# Altium PCB WirelessMonitorPCB.PcbDoc
Units mm, origin at the board's own origin, x right, y up, seen from the top; angles counter-clockwise.
Board outline 59 x 83.5 mm, 2 copper layers (Top Layer, Bottom Layer); 33 components, 22 nets, 109 pads, 10 vias.
Unrouted connection lines stored in the file: 23.
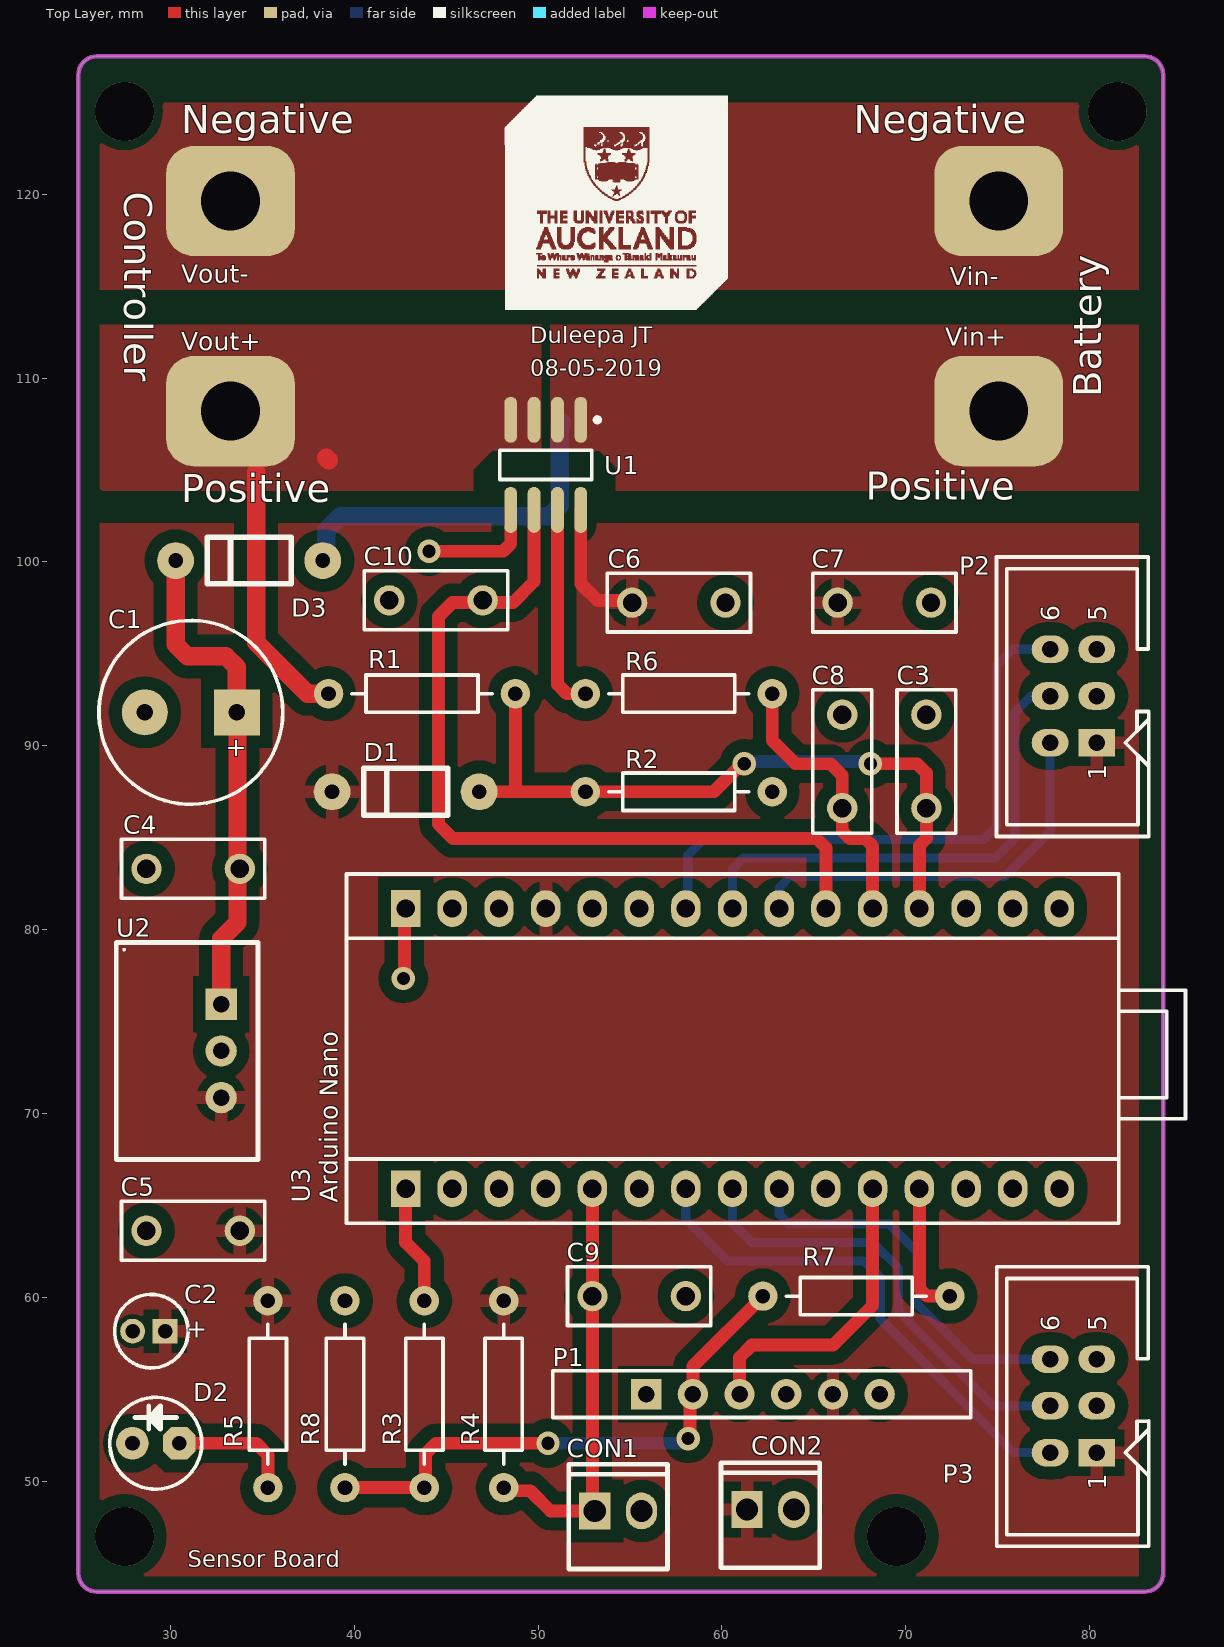
[diagram p0: Top Layer view]
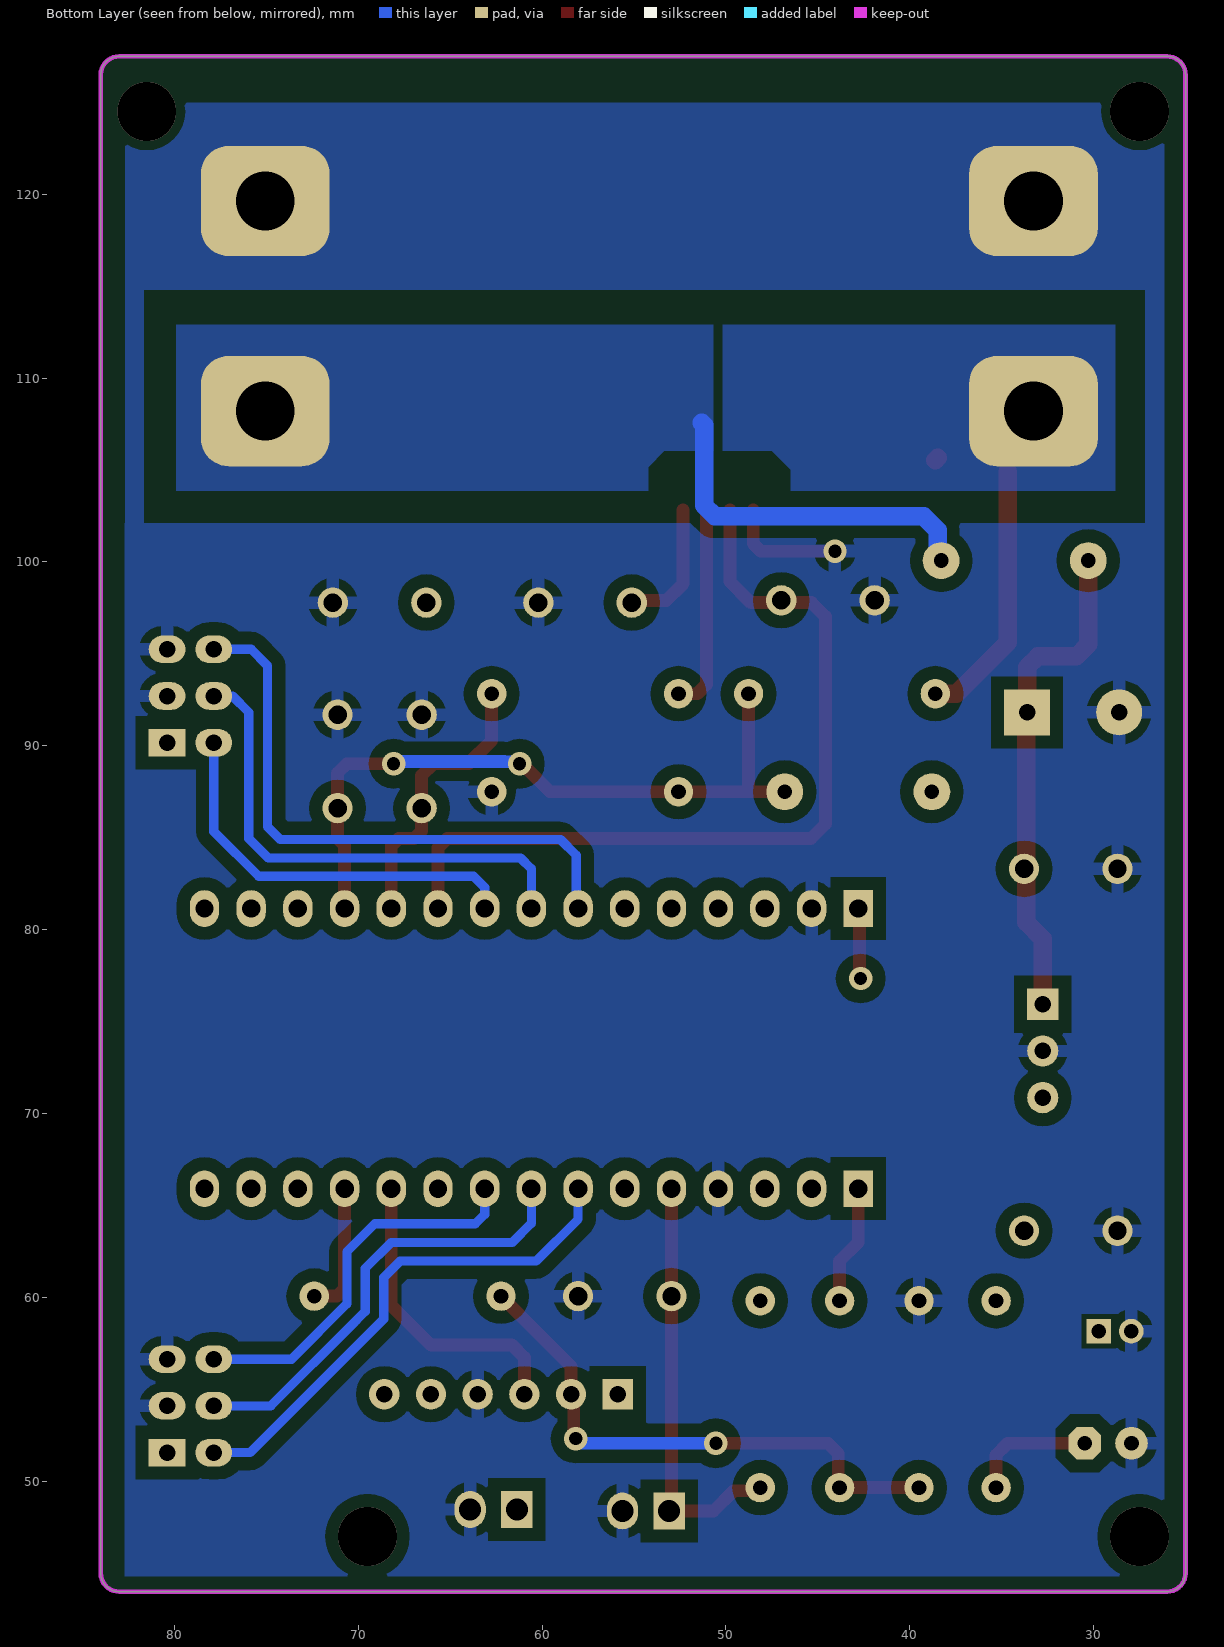
[diagram p1: Bottom Layer view, seen from below]

## Layer stack, top to bottom
Top Solder: solder mask 0.0102, Solder Resist, Dk 3.5
Top Layer: signal copper 0.0356
Dielectric 1: dielectric 0.32, FR-4, Dk 4.8
Bottom Layer: signal copper 0.0356
Bottom Solder: solder mask 0.0102, Solder Resist, Dk 3.5

## Board outline
26,44 cw(c26,45) 25,45 25,126.5 cw(c26,126.5) 26,127.5 83,127.5 cw(c83,126.5) 84,126.5 84,45 cw(c83,45) 83,44

## Design rules (kind name [scope] priority, off if disabled: settings)
Clearance Clearance_2 [InComponent('C2')] p1: gap=0.25 ignorepadtopadclearanceinfootprint=FALSE
Clearance Clearance_1 [(InNamedPolygon('5Vplane') OR InNamedPolygon('GNDplane'))] p2: gap=0.7 ignorepadtopadclearanceinfootprint=FALSE
Clearance [All] p3: gap=0.5 ignorepadtopadclearanceinfootprint=FALSE
HoleSize [All] p1: absolutevalues=TRUE maxlimit=5 minlimit=0.2 maxpercent=80.000 minpercent=20.000
PolygonConnect PolygonConnect_1 [(IsNamedPolygon('5Vplane') OR IsNamedPolygon('GNDplane'))] p1: connectstyle=Relief reliefconductorwidth=0.7 reliefentries=4 polygonreliefangle="90 Angle" airgapwidth=0.5
PolygonConnect [(IsNamedPolygon('Bottom Layer-GND 1') OR IsNamedPolygon('Bottom Layer-Vin') OR IsNamedPolygon('Bottom Layer-Vout') OR IsNamedPolygon('Top Layer-GND') OR IsNamedPolygon('Top Layer-Vin') OR IsNamedPolygon('Top Layer-Vout'))] p2: connectstyle=Direct reliefconductorwidth=0.254 reliefentries=4 polygonreliefangle="90 Angle" airgapwidth=0.254
RoutingVias [All] p1: holewidth=0.711 width=1.27 viastyle="Through Hole" minholewidth=0.711 minwidth=1.27 maxholewidth=0.711 maxwidth=1.27
SolderMaskExpansion [All] p1: expansion=0.102
Width [All] p1: maxlimit=20 minlimit=0.254 preferedwidth=1
29 further rules are at their usual default settings.

## Components (designator, comment, footprint, x,y, rotation, side; value= is the part's Value field where it differs from the comment)
C1 "ECAP" CR05 31.115,91.821 r180 top
C2 "ECAP" CR015 28.968,58.166 r180 top
C3 "Film Cap" CB05 71.12,89.154 r270 top
C4 "Film Cap" CB05 31.242,83.312 r0 top
C5 "Film Cap" CB05 31.242,63.627 r0 top
C6 "Film Cap" CB05 57.658,97.79 r180 top
C7 "Film Cap" CB05 68.834,97.79 r180 top
C8 "Film Cap" CB05 66.548,89.154 r270 top
C9 "Film Cap" CB05 55.499,60.071 r180 top
C10 "Film Cap" CB05 44.45,97.917 r0 top
CON1 "Header 2X1" HDR2X1_2P54 53.086,48.387 r90 top
CON2 "Header 2X1" HDR2X1_2P54 61.37,48.467 r90 top
D1 "Diode" DAX4 42.799,87.503 r180 top
D2 "LED" LEDTH 30.48,52.07 r180 top
D3 "Diode" DAX4 34.29,100.076 r180 top
P1 "BlueTooth-Module" HDRBLE 55.88,54.737 r0 top
P2 "HDR3X2" HDR2X3_2P54 80.39,90.17 r90 top
P3 "HDR3X2" HDR2X3_2P54 80.391,51.562 r90 top
R1 "Resistor" RAX4 43.688,92.837 r180 top
R2 "Resistor" RAX4 57.658,87.503 r180 top
R3 "Resistor" RAX4 43.815,54.737 r90 top
R4 "Resistor" RAX4 48.133,54.737 r90 top
R5 "Resistor" RAX4 35.306,54.737 r90 top
R6 "Resistor" RAX4 57.658,92.837 r180 top
R7 "Resistor" RAX4 67.31,60.071 r0 top
R8 "Resistor" RAX4 39.497,54.737 r90 top
U1 "ACS730" SOIC8 50.419,105.283 r270 top
U2 "SRH05SXX" SRH05 30.916,73.406 r270 top
U3 "Arduino Nano" ArduinoNano 60.579,73.533 r180 top
Vin+ "CON" CON_M3 75.057,108.204 r0 top
Vin- "CON" CON_M3 75.057,119.634 r0 top
Vout+ "CON" CON_M3 33.274,108.204 r0 top
Vout- "CON" CON_M3 33.274,119.634 r0 top

## Footprints (in the part's own frame and the unit in brackets; to place one, negate y for a bottom-side part, rotate by r counter-clockwise, add the part's x,y. Pads: shape width x height; smd on the part's side, far side on the other; paste and mask are expansions set on the pad)
ArduinoNano [mm]
  rect 1.6x2 hole 1: 1(17.78,-7.62) 30(17.78,7.62)
  oval 1.6x2 hole 1: 2(15.24,-7.62) 3(12.7,-7.62) 4(10.16,-7.62) 5(7.62,-7.62) 6(5.08,-7.62) 7(2.54,-7.62) 8(0,-7.62) 9(-2.54,-7.62) 10(-5.08,-7.62) 11(-7.62,-7.62) 12(-10.16,-7.62) 13(-12.7,-7.62) 14(-15.24,-7.62) 15(-17.78,-7.62) 16(-17.78,7.62) 17(-15.24,7.62) 18(-12.7,7.62) 19(-10.16,7.62) 20(-7.62,7.62) 21(-5.08,7.62) 22(-2.54,7.62) 23(0,7.62) 24(2.54,7.62) 25(5.08,7.62) 26(7.62,7.62) 27(10.16,7.62) 28(12.7,7.62) 29(15.24,7.62)
  silkscreen extent -24.64,-9.5 21,9.5
CB05 [mm]
  round 1.65 hole 1: 1(-2.54,0) 2(2.54,0)
  silkscreen extent -3.9,-1.6 3.9,1.6
CON_M3 [mm]
  rrect50% 7x6 hole 3.2: 1(0,0)
CR05 [mm]
  rect 2.5x2.5 hole 0.9: 1(-2.5,0)
  round 2.5 hole 0.9: 2(2.5,0)
  silkscreen extent -5,-5 5,5
CR015 [mm]
  rect 1.35x1.35 hole 0.8: 1(-0.75,0)
  round 1.35 hole 0.8: 2(1.016,0)
  silkscreen extent -2,-2 2,2
DAX4 [mm]
  round 2.007 hole 0.8: 1(-4,0) 2(4,0)
  silkscreen extent -2.29,-1.27 2.29,1.27
HDR2X1_2P54 [mm] "Polarised Header 2 way"
  rect 2x1.7 hole 1.2: 1(0,0)
  oval 2x1.7 hole 1.2: 2(0,-2.54)
  silkscreen extent -3.16,-3.96 2.54,1.42, body extent -3.3,-3.64 3.17,1.44, height 7.39
HDR2X3_2P54 [mm] "IDC 3X2 Way 2.54 pitch"
  rect 1.5x2 hole 0.9: 1(0,0)
  oval 1.5x2 hole 0.9 paste+0: 2(0,2.54)
  oval 1.5x2 hole 0.9: 3(2.54,0) 4(2.54,2.54) 5(5.08,0) 6(5.08,2.54)
  silkscreen extent -5.1,-2.82 10.1,5.45, body extent -5.07,-3.17 10.17,6.28, height 9.1
HDRBLE [mil] "Connector for BLE"
  rect 65x65 hole 35.43: 1(0,0)
  round 65 hole 35.43: 2(100,0) 3(200,0) 4(300,0) 5(400,0) 6(500,0)
  silkscreen extent -200,-50 695,50
LEDTH [mil] "LED through hole"
  oct 70x70 hole 31.5: 1(0,0)
  round 70 hole 31.5: 2(100,0)
  silkscreen extent -48,-98 148,98
RAX4 [mm]
  round 1.6 hole 0.8: 1(-5.08,0) 2(5.08,0)
  silkscreen extent -3.81,-1.02 3.81,1.02
SOIC8 [mm]
  oval 2.5x0.7 smd: 1(-2.45,1.905) 2(-2.45,0.635) 3(-2.45,-0.635) 4(-2.45,-1.905) 5(2.45,-1.905) 6(2.45,-0.635) 7(2.45,0.635) 8(2.45,1.905)
  silkscreen extent -2.57,-2.5 0.8,2.93, body extent -2,-2.5 2,2.5, height 1.75
SRH05 [mm]
  rect 1.7x1.7 hole 0.9: 1(-2.54,1.85)
  round 1.7 hole 0.9: 2(0,1.85) 3(2.54,1.85)
  silkscreen extent -5.9,-3.85 5.9,3.85, body extent -5.9,-3.85 5.9,3.85, height 10

## Part data
C3 C4 C5 C6 C7 C8 C9 C10: library part FCAPAX5, "Film Cap Ax5"
CON1 CON2: library part HDR2X1
P1: library part HM10_Module, "Header, 6-Pin", LatestRevisionDate=17-Jul-2002, LatestRevisionNote="Re-released for DXP Platform.", Publisher="Altium Limited"
P2 P3: "Header, 3-Pin, Dual row"
R1 R2 R3 R4 R5 R6 R7 R8: library part RESAX4, "Axial Resistor"
U1: Supplier Part Number 1=620-1794-6-ND, Supplier 1=Digikey
U2: "SRH05 Series Wing Input Range Regulators", Supplier Part Number 1=1470-4531-ND, Supplier 1=Digi-Key
U3: library part ArduinoNano
Vin+ Vin- Vout+ Vout-: library part Connector, "Term", Part Number=74651194R, Rated Current="85 A", Packaging="Tape and Reel", Published Date="Jan 2017", Publisher="Wurth Elektronik", Size="M4, thread 5mm"

## Via types
v1: diameter 1.27, hole 0.711, Top Layer to Bottom Layer, 6 vias
v2: diameter 3.2, hole 3.2, Top Layer to Bottom Layer, 4 vias

## Nets (pads, with @x,y where several pads share a name; then routed paths per layer and width w, separated by ;. In a path a pad name is that pad's centre, name@x,y a point inside that pad or via, vN(x,y) a via of type N, cw(c..) or ccw(c..) an arc to the next point about the centre after c; other vN are vias at no path point)
5V: C2.1 C5.2 C6.2 C7.2 CON2.1 D1.2 P1.5 P2.1 P3.1 R4.2 R5.2 U1.8 U2.3 U3.4 | length 7.2
  Top Layer w0.7: U1.8 52.324,98.823 53.243,97.904 55.004,97.904 C6.2
12V: U3.1 | length 3.9
  Top Layer w0.7: v1(42.672,77.343) 42.735,77.406 42.735,81.09 U3.1
A3: P2.2 U3.9 | length 22.1
  Bottom Layer w0.5: U3.9 63.119,82.296 63.726,82.903 75.41,82.903 77.85,85.343 77.85,89.788 P2.2@78.232,90.17
A4: P2.4 U3.8 | length 27.7
  Bottom Layer w0.5: U3.8 60.579,83.312 61.17,83.903 74.886,83.903 75.946,84.963 75.946,91.821 76.835,92.71 P2.4 P2.4@78.232,92.71
A5: P2.6 U3.7 | length 32.8
  Bottom Layer w0.5: U3.7 58.138,81.252 58.138,84.046 58.995,84.903 74.235,84.903 74.93,85.598 74.93,94.361 75.819,95.25 P2.6 P2.6@78.232,95.25
D4: P3.2 U3.24 | length 28
  Bottom Layer w0.5: U3.24 58.039,64.262 60.325,61.976 67.722,61.976 68.611,61.087 68.611,58.83 75.879,51.562 P3.2
D5: P3.4 U3.23 | length 24.5
  Bottom Layer w0.5: U3.23 60.579,64.037 61.624,62.992 68.199,62.992 69.611,61.58 69.611,59.244 70.104,58.751 ; 70.197,58.658 74.753,54.102 P3.4
D6: P3.6 U3.22 | length 21
  Bottom Layer w0.5: U3.22 63.119,64.516 63.627,64.008 69.088,64.008 70.611,62.485 70.611,59.658 73.627,56.642 P3.6
GND: C1.2 C2.2 C3.1 C4.1 C5.1 C6.1 C7.1 C8.1 C9.1 C10.1 CON1.2 CON2.2 D2.2 P1.4 P2.3 P2.5 P3.3 P3.5 R2.1 R8.2 U1.5 U2.2 U3.2 U3.27 Vin-.1 Vout-.1 | length 6.5
  Top Layer w0.7: v1(44.069,100.584) 48.104,100.584 48.514,100.994 U1.5
NetC1_1: C1.1 C4.2 D3.2 U2.1 | length 27.1
  Top Layer w1: D3.2 30.29,95.518 30.939,94.869 33.029,94.869 33.615,94.283 C1.1 ; U2.1 32.766,79.502 33.655,80.391 C1.1@33.655,91.821
NetD2_1: D2.1 R5.1 | length 7
  Top Layer w0.7: D2.1@30.607,52.07 34.671,52.07 35.306,51.435 R5.1 R5.1@35.062,49.657
NetR3_2: R3.2 U3.30 | length 6.5
  Top Layer w0.7: U3.30 42.799,62.992 43.815,61.976 R3.2
NetR7_2: R7.2 U3.19 | length 7.3
  Top Layer w0.7: U3.19 70.739,60.481 71.149,60.071 R7.2
RX: P1.3 U3.20 | length 16.9
  Top Layer w0.7: P1.3 60.96,56.74 61.624,57.404 66.04,57.404 68.199,59.563 U3.20 U3.20@68.199,66.04
TX: P1.2 R3.1 R7.1 R8.1 | length 30.2
  Top Layer w0.7: R8.1 R3.1 43.887,49.729 43.887,51.507 44.45,52.07 v1(50.546,52.07) ; v1(58.166,52.324) 58.275,52.433 58.275,54.592 P1.2 58.42,56.261 R7.1
  Bottom Layer w0.7: v1(50.546,52.07) 57.785,52.07 58.039,52.324 v1(58.166,52.324)
Vi: R6.2 U1.7 | length 11.2
  Top Layer w0.7: U1.7 51.054,93.345 51.562,92.837 R6.2
Vif: C8.2 R6.1 U3.11 | length 15.5
  Top Layer w0.7: R6.1 62.738,90.297 64.008,89.027 65.913,89.027 66.548,88.392 C8.2 66.548,85.373 66.958,84.963 67.789,84.963 68.199,84.553 U3.11
Vin: D3.1 U1.1 U1.2 Vin+.1 | length 19.5
  Bottom Layer w1: D3.1 38.483,100.269 38.483,101.729 39.243,102.489 50.595,102.489 51.181,103.075 51.181,107.442 51.308,107.569
Vout: R1.2 U1.3 U1.4 Vout+.1 | length 14.5
  Top Layer w1: 34.671,104.902 34.671,95.631 37.465,92.837 R1.2 ; 38.481,105.664 38.608,105.537
Vs: C9.2 CON1.1 R4.1 U3.26 | length 23
  Top Layer w0.7: R4.1 48.305,49.485 49.575,49.485 50.673,48.387 CON1.1@52.959,48.387 ; U3.26 C9.2 CON1.1@52.959,48.387 ; CON1.1 CON1.1@52.959,48.387
Vvf: C3.2 D1.1 R1.1 R2.2 U3.12 | length 37.9
  Top Layer w0.7: D1.1 R2.2 59.563,87.503 v1@61.087,89.027 ; 48.768,87.63 R1.1 ; v1(68.072,89.027) 70.612,89.027 71.12,88.519 C3.2 71.12,84.963 70.739,84.582 U3.12
  Bottom Layer w0.7: v1(61.214,89.027) 61.323,89.136 62.038,89.136 62.055,89.153 67.792,89.153 67.918,89.027 v1(68.072,89.027)
Vz: C10.2 U1.6 U3.10 | length 46.1
  Top Layer w0.7: U1.6 49.784,98.933 48.641,97.79 46.228,97.79 45.339,97.79 44.577,97.028 44.577,85.754 45.368,84.963 65.151,84.963 65.659,84.455 U3.10
pads on no net: P1.1 P1.6 U3.3 U3.5 U3.6 U3.13 U3.14 U3.15 U3.16 U3.17 U3.18 U3.21 U3.25 U3.28 U3.29
copper on no net:
  other v2: 27.5,47 69.5,47 27.5,124.5 81.5,124.5

## Polygon pours and split planes (outlines as drawn)
5V on Top Layer "5Vplane" (solid, pour order 16): 26.162,102.108 82.677,102.108 82.677,44 26.162,44
Vin on Top Layer "Top Layer-Vin" (solid, pour order 4): 50.673,112.903 50.673,106.045 53.34,106.045 54.229,105.156 54.229,103.886 82.677,103.886 82.677,112.903
Vout on Top Layer "Top Layer-Vout" (solid, pour order 2): 26.162,112.903 50.165,112.903 50.165,106.045 47.498,106.045 46.482,105.029 46.482,103.886 26.289,103.886 26.162,104.013
GND on Top Layer "Top Layer-GND" (solid, pour order 0): 26.162,124.968 82.677,124.968 82.677,114.808 26.162,114.808
Vin on Bottom Layer "Bottom Layer-Vin" (solid, pour order 12): 50.673,112.903 50.673,106.045 53.34,106.045 54.229,105.156 54.229,103.886 79.883,103.886 79.883,112.903
GND on Bottom Layer "GNDplane" (solid, pour order 18): 26.162,102.108 82.687,102.108 82.687,44 26.162,44
GND on Bottom Layer "Bottom Layer-GND" (solid, pour order 22): 81.661,116.586 81.661,101.473 82.804,101.473 82.677,101.6 82.677,116.586
GND on Bottom Layer "Bottom Layer-GND 2" (solid, pour order 20): 26.162,115.697 26.162,100.584 27.305,100.584 27.193,100.696 27.193,115.697
Vout on Bottom Layer "Bottom Layer-Vout" (solid, pour order 10): 28.829,112.903 50.165,112.903 50.165,106.045 47.498,106.045 46.482,105.029 46.482,103.886 28.829,103.886
GND on Bottom Layer "Bottom Layer-GND 1" (solid, pour order 6): 26.162,124.968 82.677,124.968 82.677,114.808 26.162,114.808

## Keep-outs
Keep-Out Layer:
  the board outline again, w0.254

## Silkscreen, mask and mechanical layers (free items; w line width, h text height)
Top Overlay:
  drawing of 24 lines, arcs and shapes, not listed
  text "Negative" at 30.607,123.322 h1.52
  text "Negative" at 67.183,123.322 h1.52
  text "Controller" at 27.5,120.142 h1.52 r270
  text "Duleepa JT" at 49.579,111.887 h0.9
  text "08-05-2019" at 49.579,110.109 h0.9
  text "Battery" at 80.645,108.966 h1.52 r90
  text "Positive" at 67.818,103.378 h1.52
  text "Positive" at 30.607,103.251 h1.52
  text "Sensor Board" at 30.942,45.339 h0.9

## Text inside footprints (layer, text, board x,y; h text height)
C1: Top Overlay "+" at 34.163,90.297 h1 r180
C2: Top Overlay "+" at 32.016,58.674 h1 r180
P2: Top Overlay "1" at 80.898,88.138 h1 r90; Top Overlay "5" at 80.898,96.774 h1 r90; Top Overlay "6" at 78.358,96.774 h1 r90
P3: Top Overlay "1" at 80.899,49.53 h1 r90; Top Overlay "5" at 80.899,58.166 h1 r90; Top Overlay "6" at 78.359,58.166 h1 r90